# Altium PCB Energino.PcbDoc
Units mil, origin at the board's own origin, x right, y up, seen from the top; angles counter-clockwise.
Board outline 2500 x 3000 mil, 4 copper layers (Top Layer, Internal Plane 1, Internal Plane 2, Bottom Layer), stack 18.2 mil thick; 14 components, 17 nets, 59 pads, 0 vias.
Unrouted connection lines stored in the file: 2.
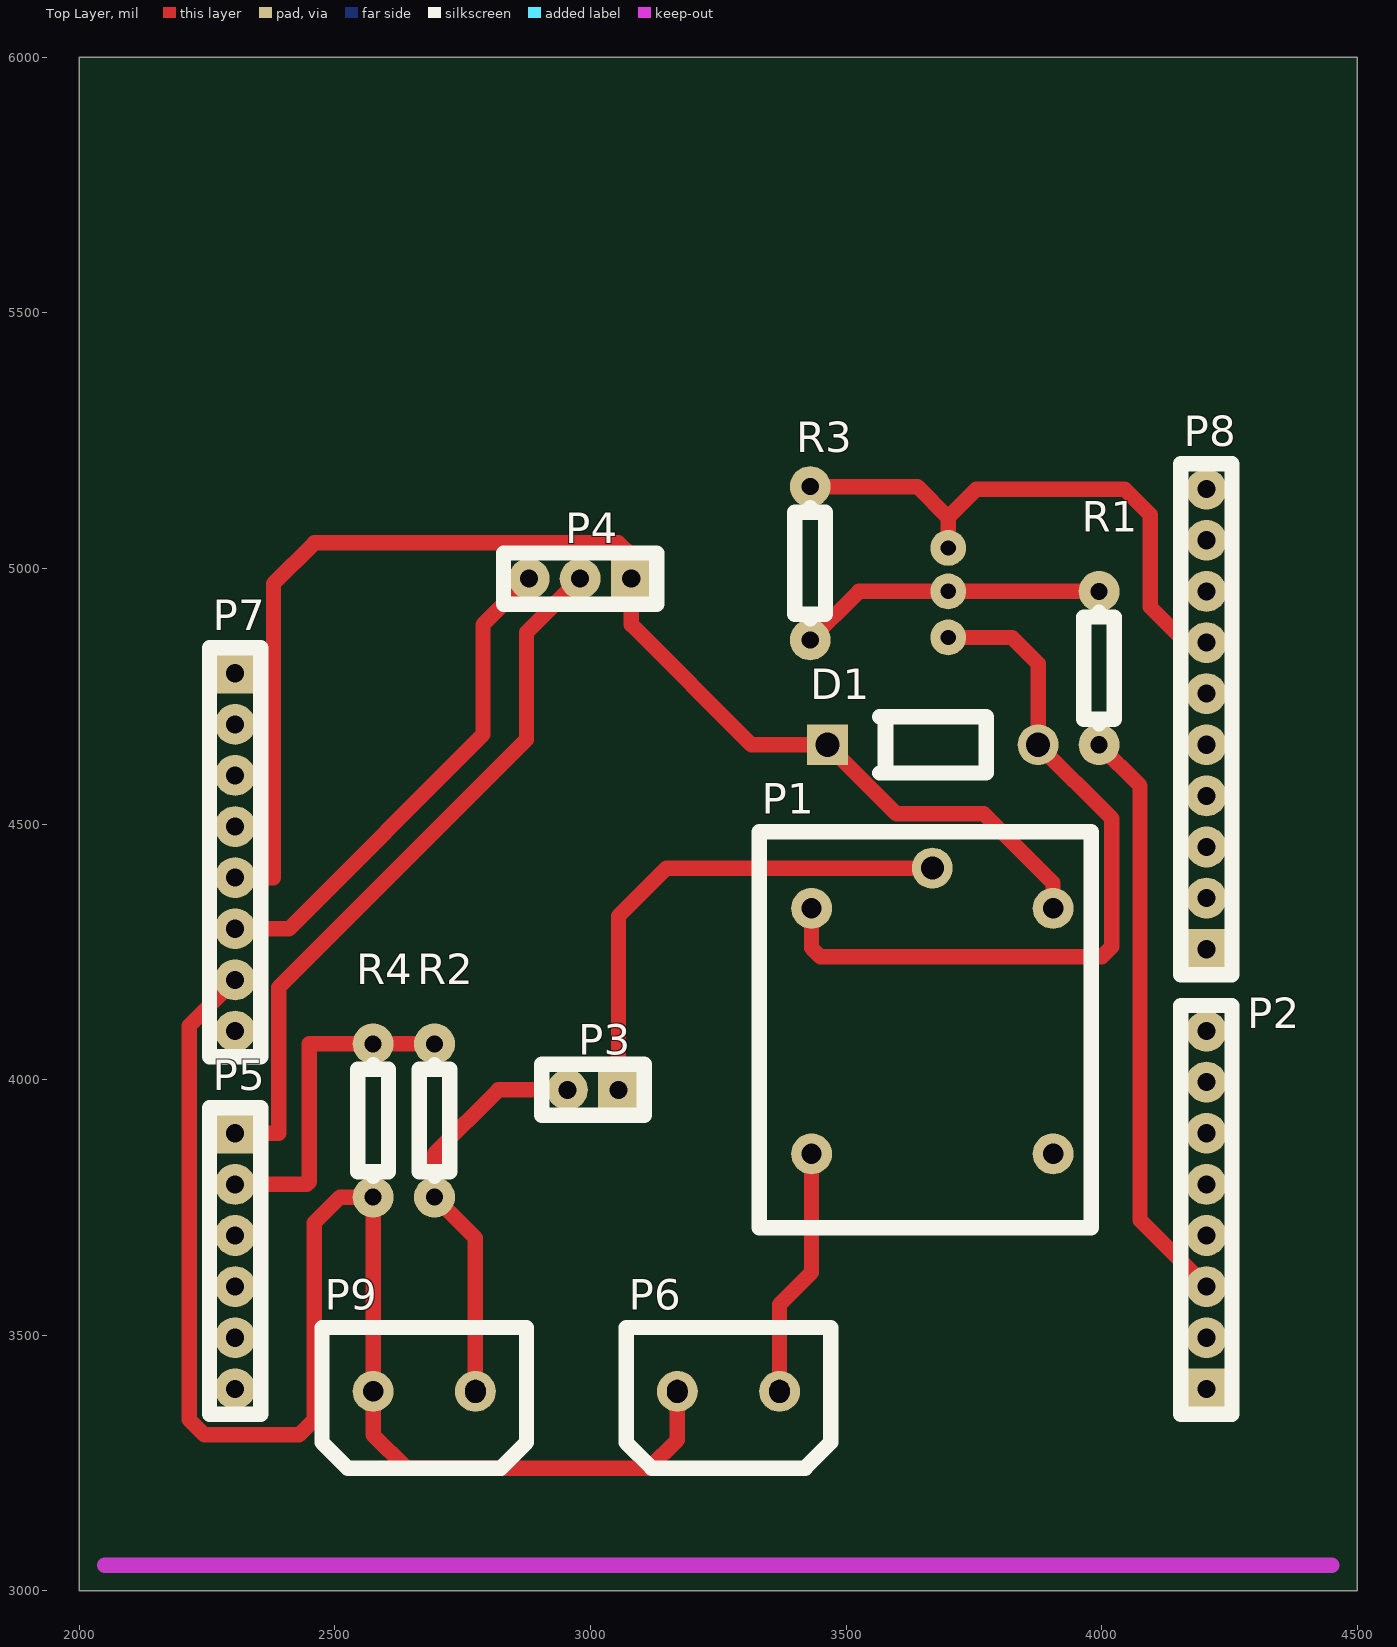
[diagram p0: Top Layer view]
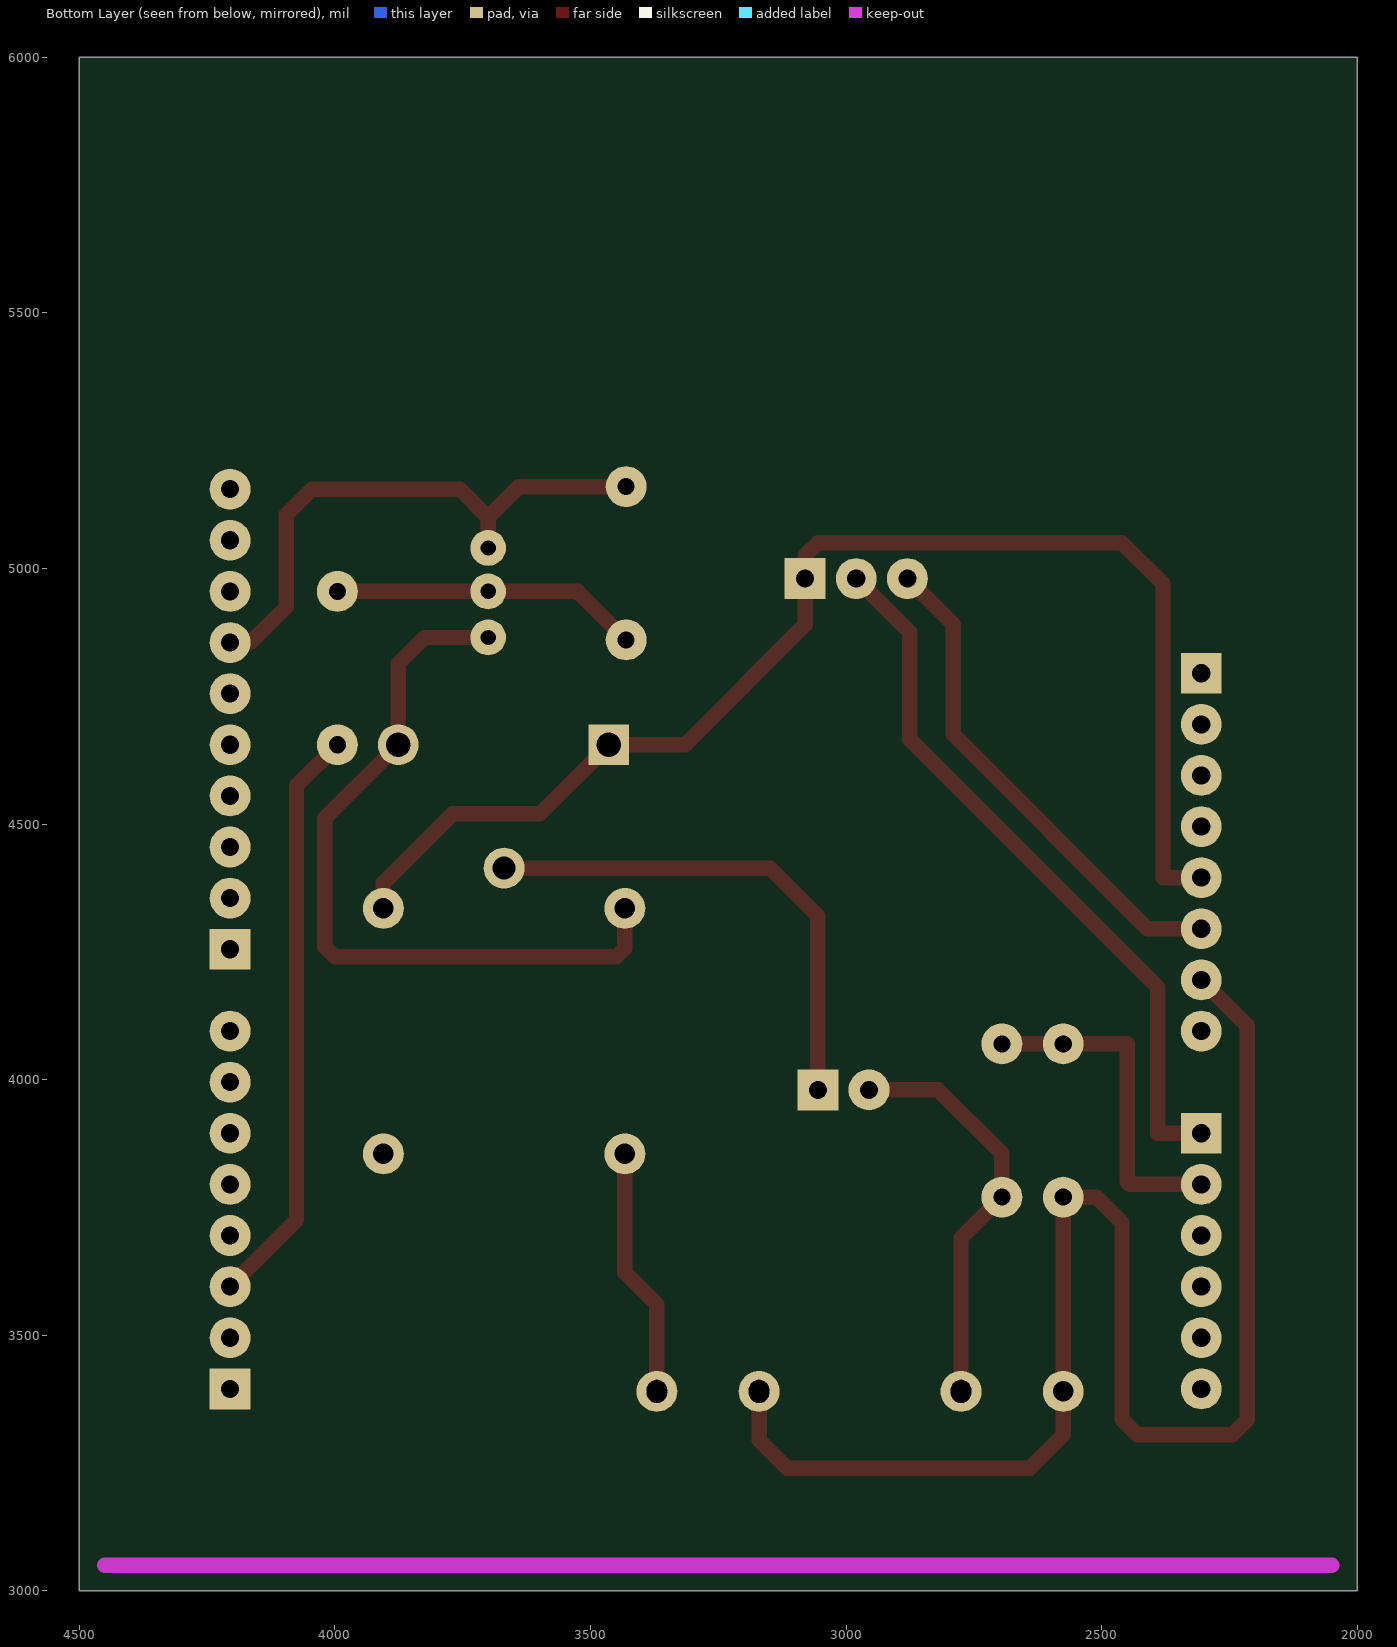
[diagram p1: Bottom Layer view, seen from below]
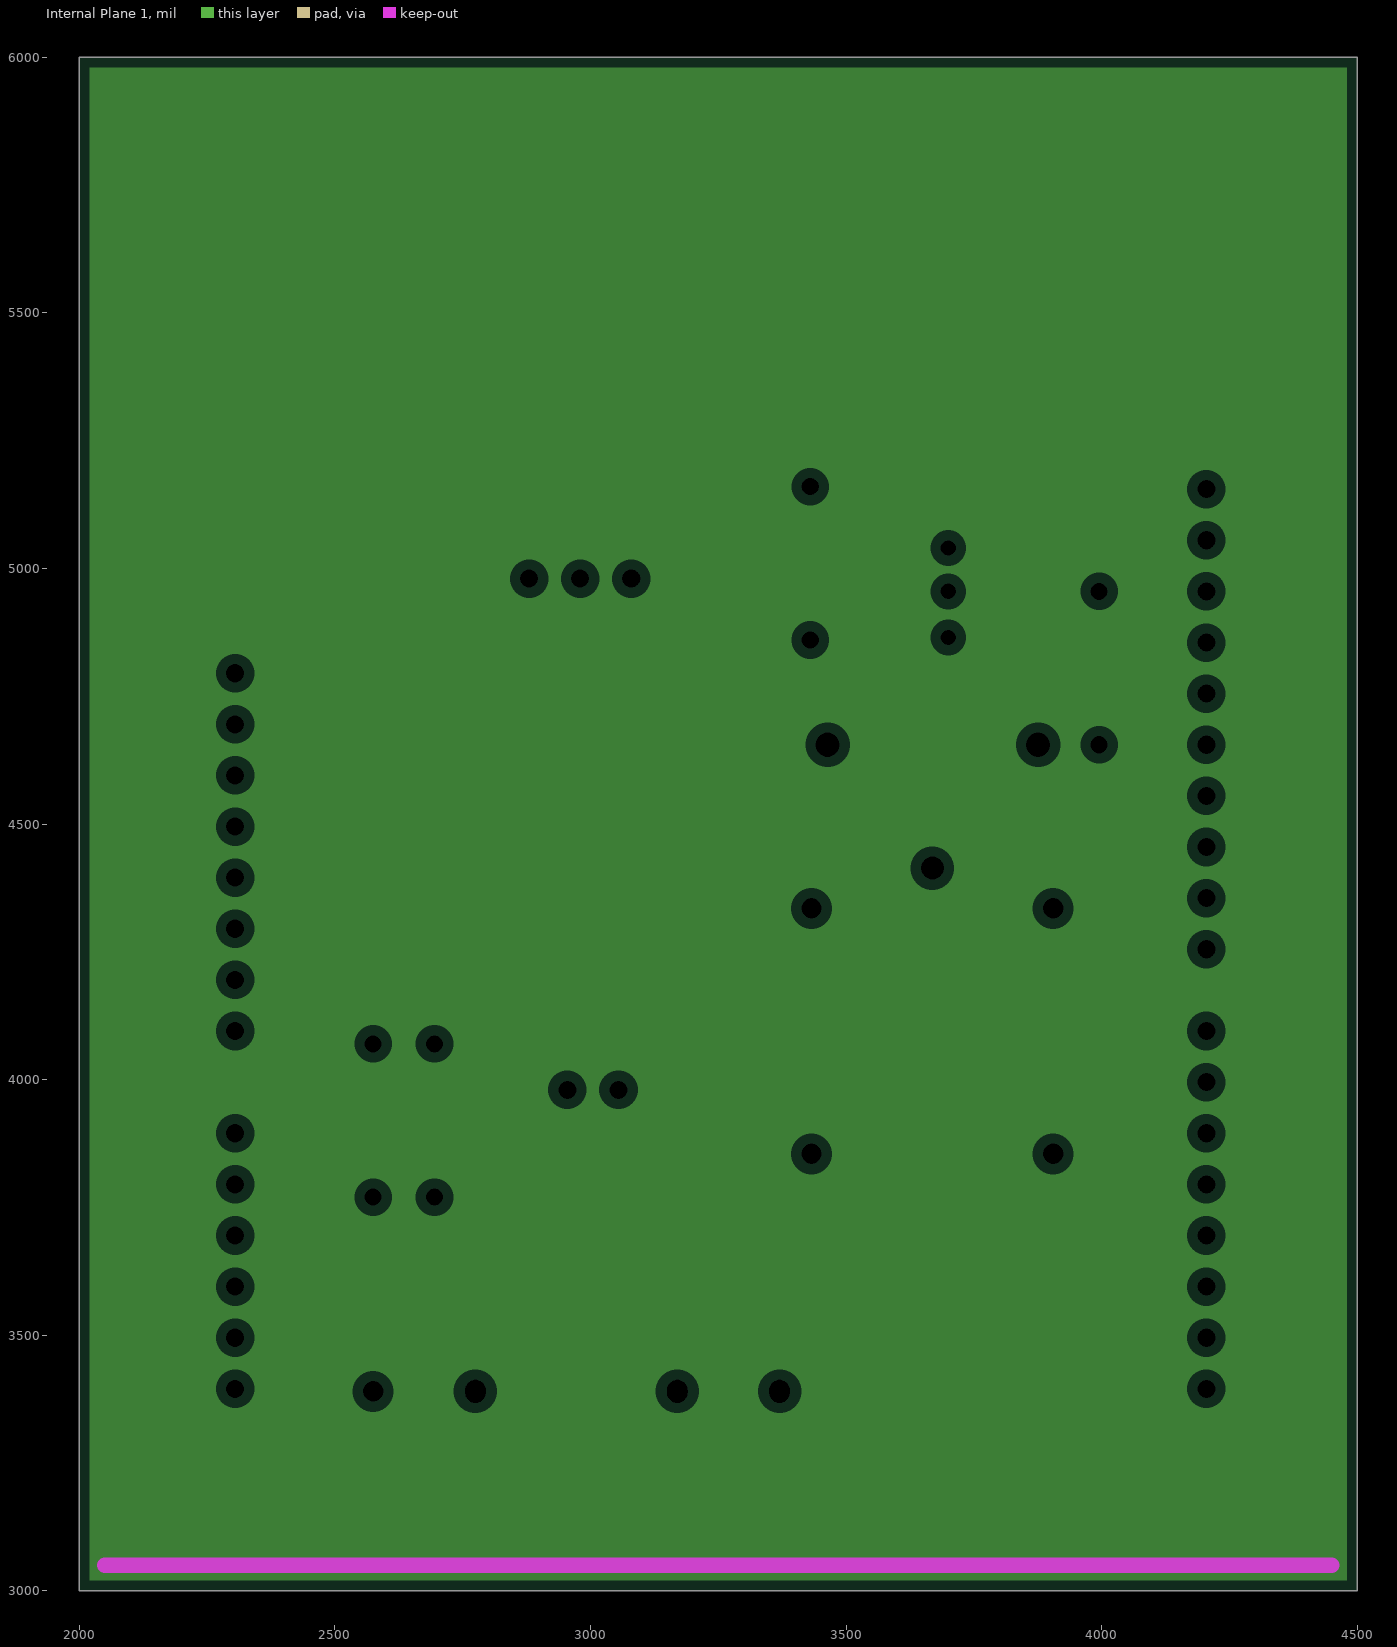
[diagram p2: Internal Plane 1, clearances drawn from the general rule]
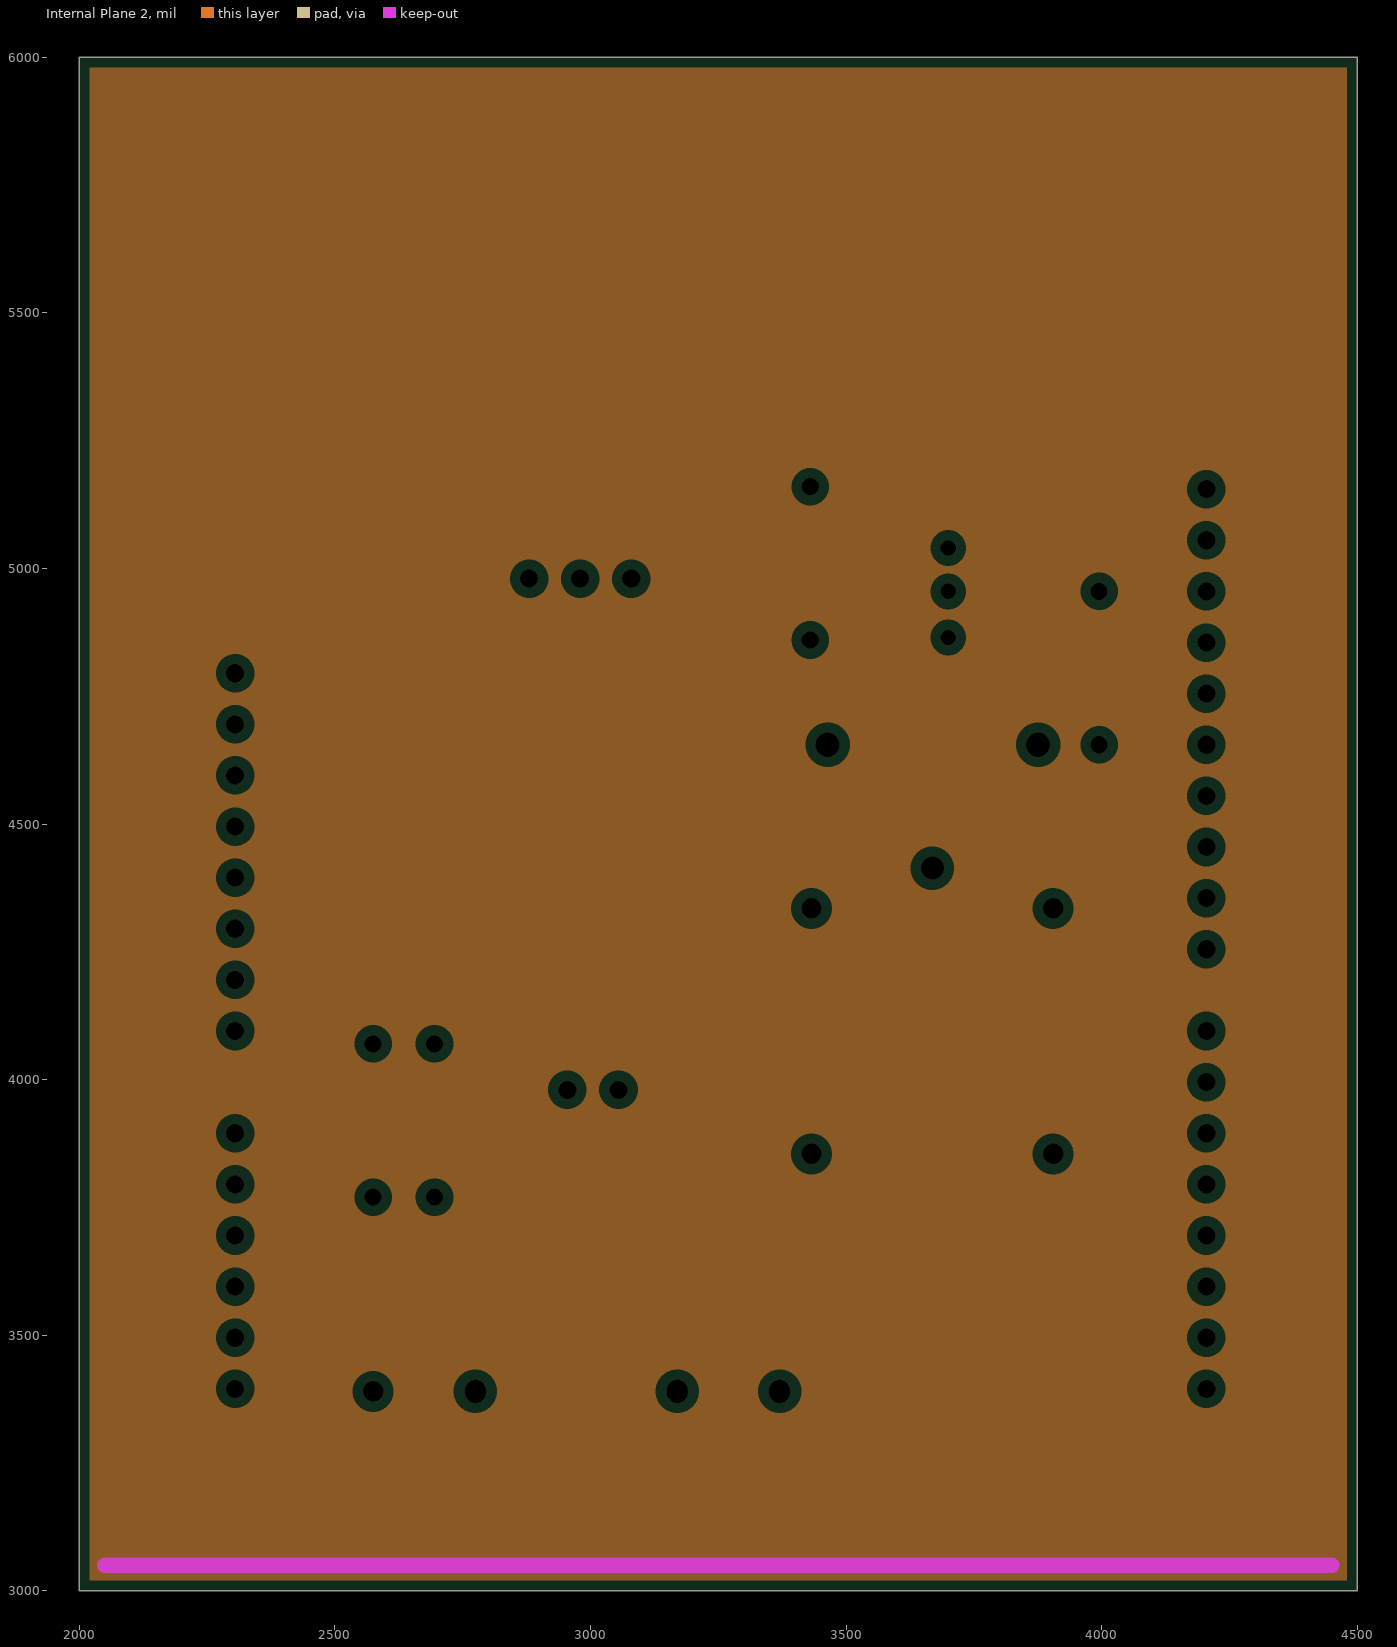
[diagram p3: Internal Plane 2, clearances drawn from the general rule]

## Layer stack, top to bottom
Top Solder: solder mask 0.4, Solder Resist, Dk 3.5
Top Layer: signal copper 1.4
Internal Plane 1: plane copper 1.4
Internal Plane 2: plane copper 1.4
Dielectric 1: dielectric 12.6, FR-4, Dk 4.8
Bottom Layer: signal copper 1.4
Bottom Solder: solder mask 0.4, Solder Resist, Dk 3.5

## Board outline
2000,3000 4500,3000 4500,6000 2000,6000

## Design rules (kind name [scope] priority, off if disabled: settings)
Clearance [All] p1: gap=8
PlaneClearance [All] p1: clearance=20
PlaneConnect [All] p1: planeconnectstyle=Relief reliefexpansion=20 reliefentries=4 reliefconductorwidth=10 reliefairgap=10
PolygonConnect [All] p1: connectstyle=Relief reliefconductorwidth=10 reliefentries=4 polygonreliefangle="90 Angle" airgapwidth=10
RoutingVias [All] p1: holewidth=25 width=40 viastyle="Through Hole" minholewidth=28 minwidth=50 maxholewidth=28 maxwidth=50
SolderMaskExpansion [All] p1: expansion=4
Width [All] p1: maxlimit=50 minlimit=8 preferedwidth=20
27 further rules are at their usual default settings.

## Components (designator, comment, footprint, x,y, rotation, side; value= is the part's Value field where it differs from the comment)
D1 "Diode 1N4001" DO-41 3670,4655 r180 top
P1 "Relay" JQC-3F 3905,4335 r180 top
P2 "Header 8" HDR1X8 4205,3395 r90 top
P3 "Header 2" HDR1X2 3055,3980 r180 top
P4 "Header 3" HDR1X3 3080,4980 r180 top
P5 "Header 6" HDR1X6 2305,3895 r270 top
P6 "TB2" TB2#1 3370,3390 r180 top
P7 "Header 8" HDR1X8 2305,4795 r270 top
P8 "Header 10" HDR1X10 4205,4255 r90 top
P9 "TB2" TB2#2 2775,3390 r180 top
R1 "Res1" AXIAL-0.3 3995,4805 r90 top
R2 "Res1" AXIAL-0.3 2695,3920 r270 top
R3 "Res1" AXIAL-0.3 3430,5010 r270 top
R4 "Res1" AXIAL-0.3 2575,3920 r90 top

## Footprints (in the part's own frame and the unit in brackets; to place one, negate y for a bottom-side part, rotate by r counter-clockwise, add the part's x,y. Pads: shape width x height; smd on the part's side, far side on the other; paste and mask are expansions set on the pad)
AXIAL-0.3 [mil] "Axial Device, Thru-Hole; 2 Leads; 0.3 in Pin Spacing"
  round 80 hole 33.46: 1(-150,0) 2(150,0)
  silkscreen extent -109,-30 109,30
DO-41 [mil] "Diode, Axial; Body 5.2 x 2.7 mm (LxDia. max), Lead Dia. 0.86 mm (max)"
  round 80 hole 47.24: 1(-205.91,0)
  rect 80x80 hole 47.24: 2(205.91,0)
  silkscreen extent -104,-55 108,55
HDR1X2 [mil] "Connector; Header; 2 Position"
  rect 80x80 hole 35.43: 1(0,0)
  round 80 hole 35.43: 2(100,0)
  silkscreen extent -50,-50 150,50
HDR1X3 [mil] "Connector; Header; 3 Position"
  rect 80x80 hole 35.43: 1(0,0)
  round 80 hole 35.43: 2(100,0) 3(200,0)
  silkscreen extent -50,-50 250,50
HDR1X6 [mil] "Connector; Header; 6 Position"
  rect 80x80 hole 35.43: 1(0,0)
  round 80 hole 35.43: 2(100,0) 3(200,0) 4(300,0) 5(400,0) 6(500,0)
  silkscreen extent -50,-50 550,50
HDR1X8 [mil] "Connector; Header; 8 Position"
  rect 80x80 hole 35.43: 1(0,0)
  round 80 hole 35.43: 2(100,0) 3(200,0) 4(300,0) 5(400,0) 6(500,0) 7(600,0) 8(700,0)
  silkscreen extent -50,-50 750,50
HDR1X10 [mil] "Connector; Header; 10 Position"
  rect 80x80 hole 35.43: 1(0,0)
  round 80 hole 35.43: 2(100,0) 3(200,0) 4(300,0) 5(400,0) 6(500,0) 7(600,0) 8(700,0) 9(800,0) 10(900,0)
  silkscreen extent -50,-50 950,50
JQC-3F [mil] "Relay"
  round 80 hole 40: 1(0,0) 2(472.44,0) 4(0,480.32) 5(472.44,480.32)
  round 80 hole 45: 3(236.22,-78.74)
  silkscreen extent -75,-150 575,625
TB2#1 [mil] "Terminal Block 2Pin"
  round 80 hole 40 slot 45 at 90 deg: 1(0,0) 2(200,0)
  silkscreen extent -100,-125 300,150
TB2#2 [mil] "Terminal Block 2Pin"
  round 80 hole 40 slot 45 at 90 deg: 1(0,0)
  round 80 hole 40: 2(200,0)
  silkscreen extent -100,-125 300,150

## Part data
D1: "1 Amp General Purpose Rectifier"
P1: library part JQC-3F
P2 P7: "Header, 8-Pin"
P3: "Header, 2-Pin"
P4: "Header, 3-Pin"
P5: "Header, 6-Pin"
P8: "Header, 10-Pin"
R1 R2 R3 R4: "Resistor"

## Free pads (board coordinates)
  round 70 hole 30: 0(3700,4955) 1(3700,5040) 2(3700,4865)

## Nets (pads, with @x,y where several pads share a name; then routed paths per layer and width w, separated by ;. In a path a pad name is that pad's centre, name@x,y a point inside that pad or via, vN(x,y) a via of type N, cw(c..) or ccw(c..) an arc to the next point about the centre after c; other vN are vias at no path point)
3.3V: P7.4
A0: P4.2 P5.1 | length 1414.4
  Top Layer w30: P5.1 2390,3895 2390,4180 2875,4665 2875,4875 P4.2
A1: P5.2 R2.1 R4.2 | length 662.1
  Top Layer w30: P5.2 2445,3795 2450,3800 2450,4070 R4.2 R2.1
A2: P5.3
A3: P5.4
A4: P5.5
A5: P5.6
GND: P4.3 P6.2 P7.6 P7.7 P8.7 P9.2 pad.1 R3.1 R4.1 | length 4989.6
  Top Layer w30: P7.7 2215,4105 2215,3335 2245,3305 2430,3305 2460,3335 2460,3720 2510,3770 R4.1 P9.2 2575,3305 2640,3240 3115,3240 3170,3295 P6.2 ; P7.6 2410,4295 2790,4675 2790,4890 P4.3 ; R3.1 3640,5160 3700,5100 ; pad.1 3700,5100 ; P8.7 4165,4855 4095,4925 4095,5105 4045,5155 3755,5155 3700,5100
IP+: P1.3 P3.1 | length 992.6
  Top Layer w30: P3.1 3055,4320 3148.74,4413.74 P1.3
IP-: P3.2 P9.1 R2.2 | length 809.9
  Top Layer w30: P9.1 2775,3690 R2.2 2695,3855 2820,3980 P3.2
NetD1_1: D1.1 P1.2 pad.2 | length 1491.3
  Top Layer w30: P1.2 3432.56,4257.44 3450,4240 4000,4240 4020,4260 4020,4510.91 D1.1 3875.91,4814.09 3825,4865 pad.2
NetP2_3: P2.3 R1.1 | length 1147
  Top Layer w30: R1.1 4075,4575 4075,3725 P2.3
NetQ1_2: pad.0 R1.2 R3.2 | length 604.4
  Top Layer w30: R3.2 3525,4955 pad.0 R1.2
OUT: P1.5 P6.1 | length 490.6
  Top Layer w30: P6.1 3370,3560 3432.56,3622.56 P1.5
RESET: P7.3
VCC: D1.2 P1.1 P4.1 P7.5 | length 2612.7
  Top Layer w30: P7.5 2380,4395 2380,4970 2460,5050 3055,5050 3080,5025 P4.1 3080,4890 3315,4655 D1.2 3599.09,4520 3770,4520 3905,4385 P1.1
VIN: P7.8
pads on no net: P1.4 P2.1 P2.2 P2.4 P2.5 P2.6 P2.7 P2.8 P7.1 P7.2 P8.1 P8.2 P8.3 P8.4 P8.5 P8.6 P8.8 P8.9 P8.10

## Keep-outs
Keep-Out Layer:
  lines w30: 2050,3050 4450,3050

## Silkscreen, mask and mechanical layers (free items; w line width, h text height)
Mechanical 1:
  lines w30: 2045,3060 2045,5600 4435,5600 ; 4445,3055 4445,5590

## Dimensions
2050,3050 to 4450,3050 on Mechanical 1